# EAGLE board Demoboard_Reste (EAGLE 6.5.0)
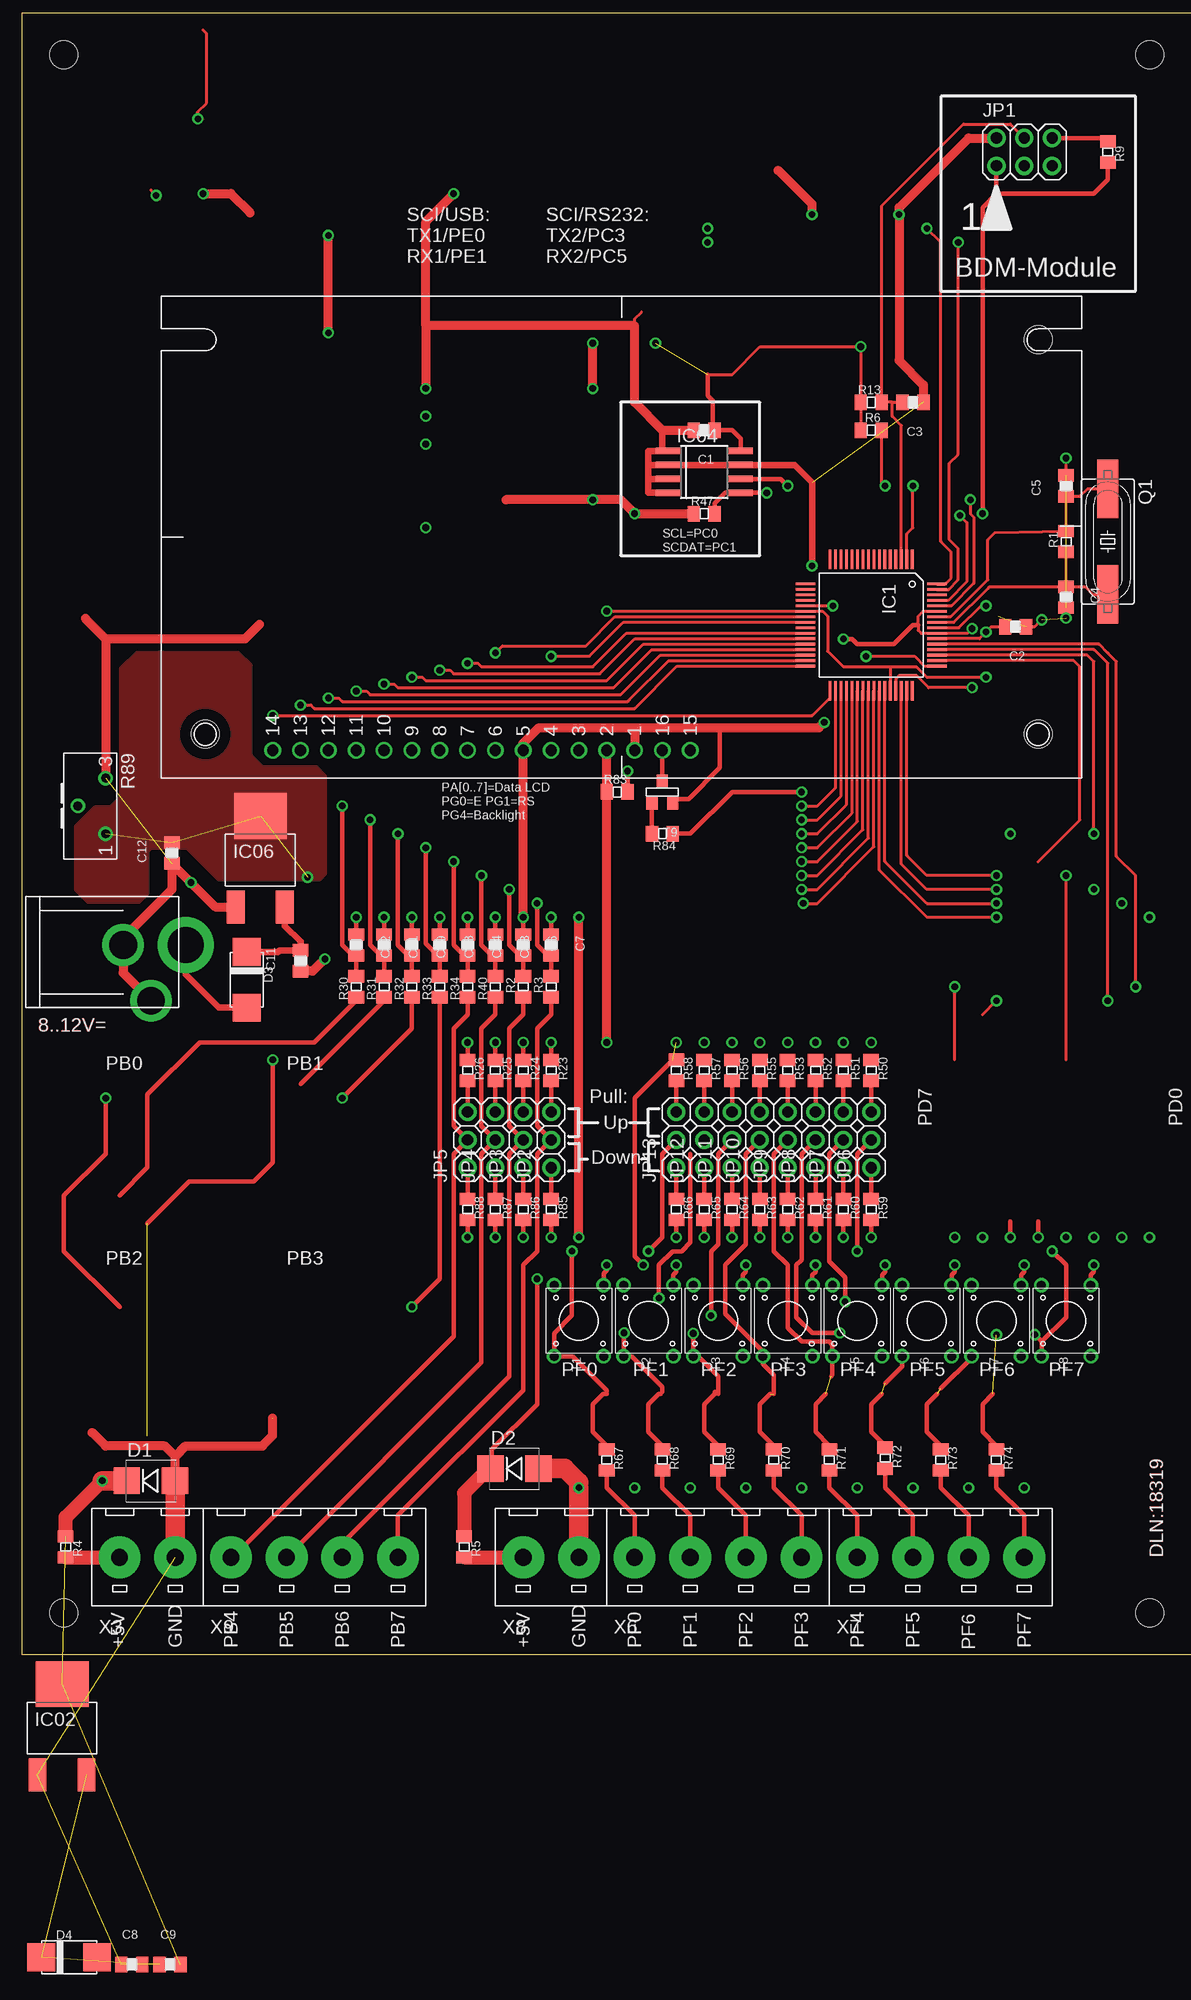
[diagram p0: board, top side]
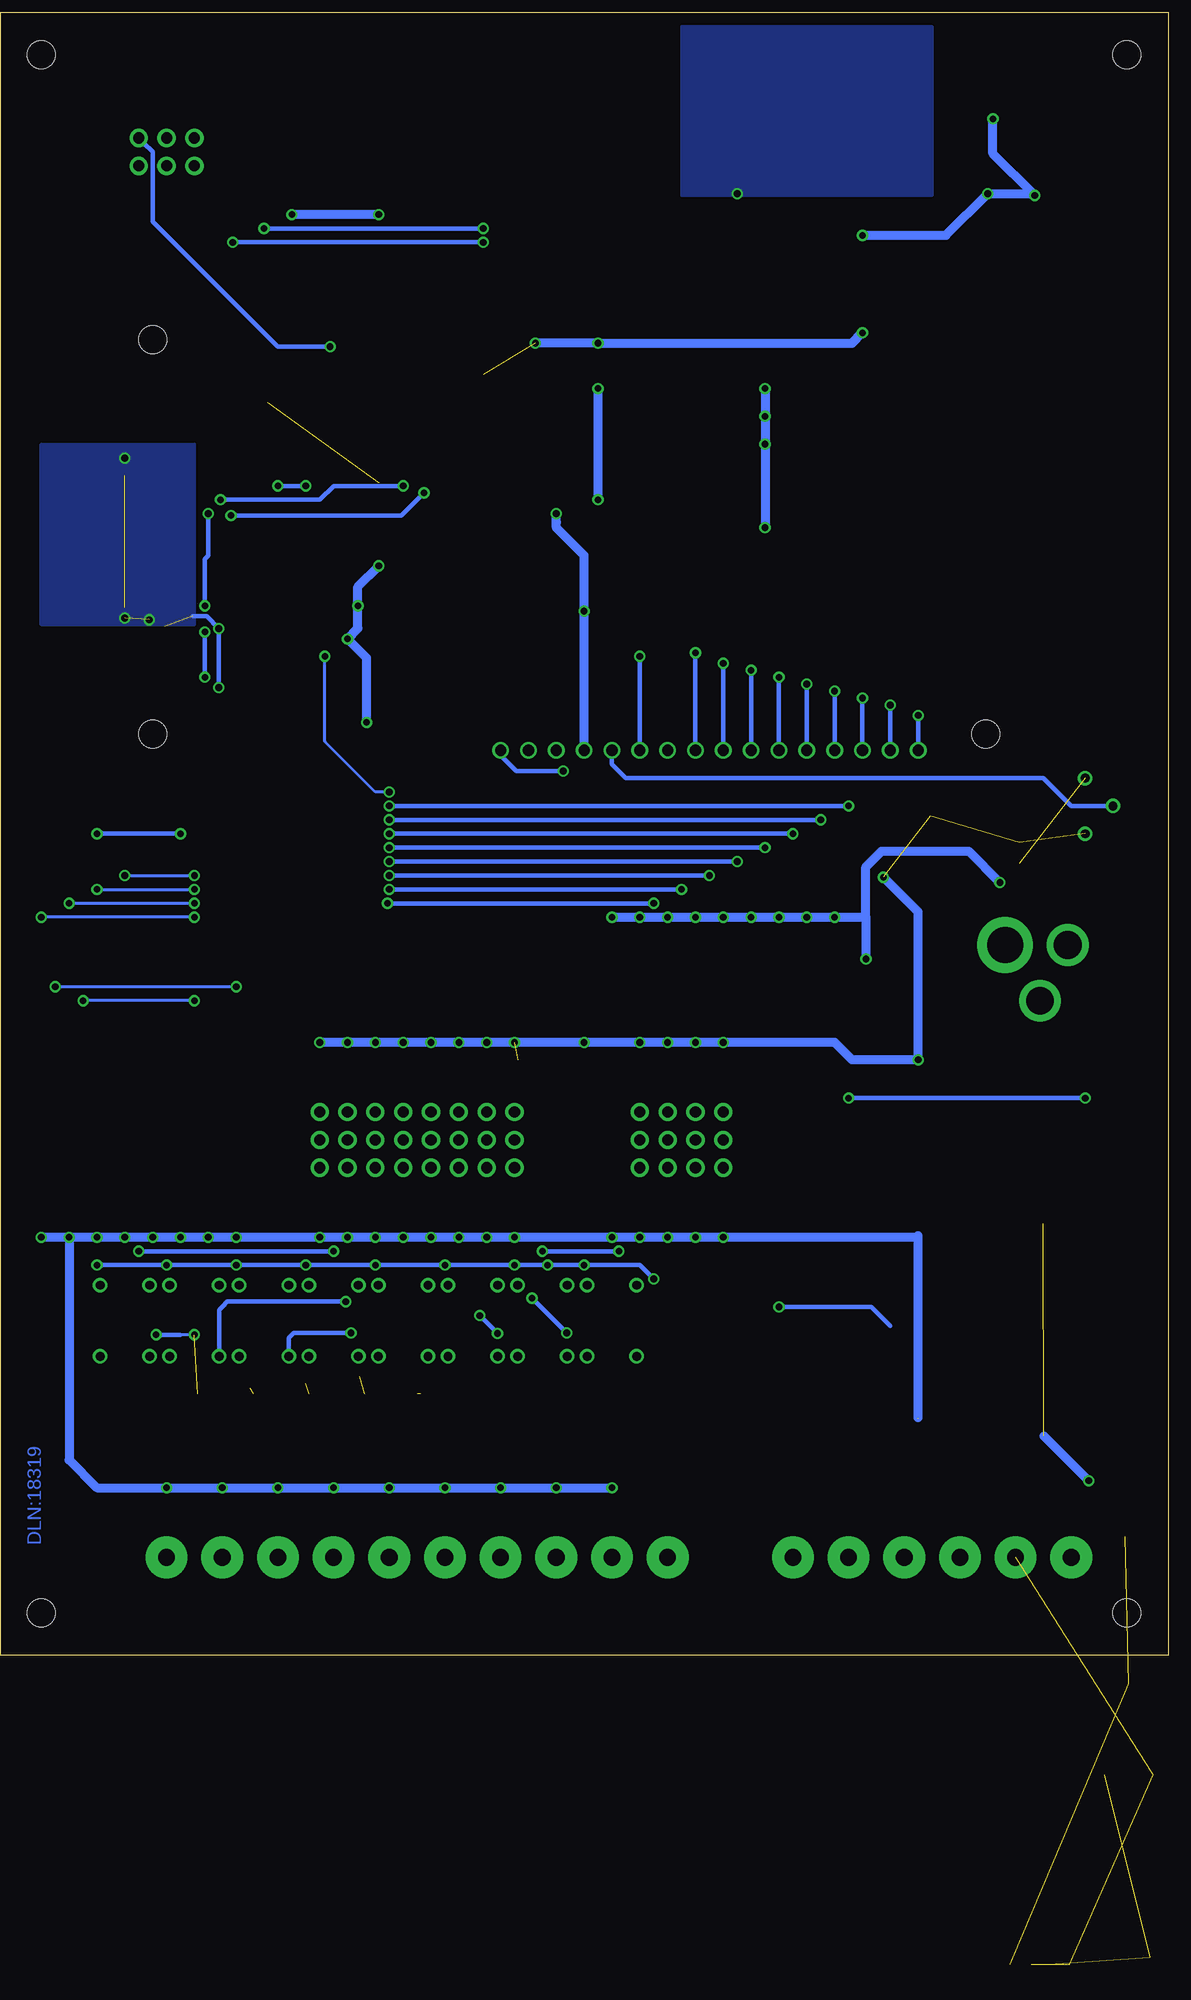
[diagram p1: board, bottom side, seen from below]

No outline drawn. Coordinates in mm, seen from the top.
Copper layers (1*16): Top 0.035mm / dielectric 1.5mm / Bottom 0.035mm
Design rules "default": minimum track width 10mil, minimum drill 24mil, track to track 8mil, track to pad 8mil, pad to pad 8mil, via to via 8mil, smd to smd 8mil, copper to edge 40mil, drill to drill 8mil, minimum pad ring 10mil, minimum via ring 8mil, stop-mask expansion 0mil, vias tented up to drill 0mil, thermal gap 10mil
Holes 2.54 mm at 4.92,146.05 103.98,146.05 103.98,3.81 4.92,3.81
Milling: 4 lines

## Footprints (pad centres in the part's own frame; a part is rotated, then mirrored left to right if it is on the bottom)
0805F = smd 1.118 x 1.422: 1 -0.953,0; 2 0.953,0
SMB = smd 2.4 x 2.4: A 2.2,0; C -2.2,0
MELF_B = smd 2.54 x 2.54: A 2.54,0; K -2.54,0
LQFP64 = smd 1.778 x 0.254: 1 -6,3.75; 2 -6,3.25; 3 -6,2.75; 4 -6,2.25; 5 -6,1.75; 6 -6,1.25; 7 -6,0.75; 8 -6,0.25; 9 -6,-0.25; 10 -6,-0.75; 11 -6,-1.25; 12 -6,-1.75; 13 -6,-2.25; 14 -6,-2.75; 15 -6,-3.25; 16 -6,-3.75; 33 6,-3.75; 34 6,-3.25; 35 6,-2.75; 36 6,-2.25; 37 6,-1.75; 38 6,-1.25; 39 6,-0.75; 40 6,-0.25; 41 6,0.25; 42 6,0.75; 43 6,1.25; 44 6,1.75; 45 6,2.25; 46 6,2.75; 47 6,3.25; 48 6,3.75 | smd 0.254 x 1.778: 17 -3.75,-6; 18 -3.25,-6; 19 -2.75,-6; 20 -2.25,-6; 21 -1.75,-6; 22 -1.25,-6; 23 -0.75,-6; 24 -0.25,-6; 25 0.25,-6; 26 0.75,-6; 27 1.25,-6; 28 1.75,-6; 29 2.25,-6; 30 2.75,-6; 31 3.25,-6; 32 3.75,-6; 49 3.75,6; 50 3.25,6; 51 2.75,6; 52 2.25,6; 53 1.75,6; 54 1.25,6; 55 0.75,6; 56 0.25,6; 57 -0.25,6; 58 -0.75,6; 59 -1.25,6; 60 -1.75,6; 61 -2.25,6; 62 -2.75,6; 63 -3.25,6; 64 -3.75,6
DPAK = smd 1.6 x 2.997: 1 -2.261,-3.658; 3 2.21,-3.658 | smd 4.826 x 4.191: 4 0,4.623
SO-08M = smd 0.6 x 2.2: 1 -1.905,-3.33; 2 -0.635,-3.33; 3 0.635,-3.33; 4 1.905,-3.33; 5 1.905,3.33; 6 0.635,3.33; 7 -0.635,3.33; 8 -1.905,3.33
2X03 = drill 1.016 pad 1.676: 1 -2.54,-1.27; 2 -2.54,1.27; 3 0,-1.27; 4 0,1.27; 5 2.54,-1.27; 6 2.54,1.27
1X03 = drill 1.016 pad 1.651: 1 -2.54,0; 2 0,0; 3 2.54,0
HC49UP = smd 5.334 x 1.93: 1 -4.826,0; 2 4.826,0
0805 = smd 1.118 x 1.422: 1 -0.953,0; 2 0.953,0
S63X = drill 0.813: 1 2.54,0; 2 0,-2.54; 3 -2.54,0
TASTE_THT = drill 0.813: A1 -3.251,2.261; A2 3.251,2.261; B1 -3.251,-2.261; B2 3.251,-2.261
SOT-23 = smd 1.016 x 1.27: 1 -0.953,0.953; 2 0.953,0.953; 3 0,-0.953
KLEMME2 = drill 1.524 pad 3.81: 1 0,-2.54; 2 0,2.54
SPP = drill 2.54 pad 3.81: 1 0,0; 3 -2.54,5.08 | drill 3.302 pad 5.08: 2 -5.715,0
KLEMME4 = drill 1.524 pad 3.81: 1 0,-7.62; 2 0,-2.54; 3 0,2.54; 4 0,7.62
FDCC1602E = drill 1.016: 1 43.18,2.54; 2 40.64,2.54; 3 38.1,2.54; 4 35.56,2.54; 5 33.02,2.54; 6 30.48,2.54; 7 27.94,2.54; 8 25.4,2.54; 9 22.86,2.54; 10 20.32,2.54; 11 17.78,2.54; 12 15.24,2.54; 13 12.7,2.54; 14 10.16,2.54; 15 48.26,2.54; 16 45.72,2.54 | hole 2.54: 4,4; 80,4; 80,40

## Placement (x,y rotation side)
C1  100nF  [0805F]  63.34,111.76 180 top
C2  100nF  [0805F]  91.76,93.82 180 top
C3  100nF  [0805F]  82.39,114.3 180 top
C4  10pF  [0805F]  96.36,96.52 270 top
C5  10pF  [0805F]  96.36,106.68 90 top
C6  10nF  [0805F]  46.83,64.77 270 top
C7  10nF  [0805F]  49.37,64.77 270 top
C8  1µF  [0805F]  11.11,-28.26 0 top
C9  1µF  [0805F]  14.61,-28.26 0 top
C11  1µF  [0805F]  26.51,63.34 90 top
C12  1µF  [0805F]  14.76,73.18 90 top
C13  10nF  [0805F]  44.29,64.77 270 top
C14  10nF  [0805F]  41.75,64.77 270 top
C18  10nF  [0805F]  39.21,64.77 270 top
C19  10nF  [0805F]  36.67,64.77 270 top
C21  10nF  [0805F]  34.13,64.77 270 top
C22  10nF  [0805F]  31.59,64.77 270 top
D1  SA5.0CA  [SMB]  12.86,15.88 0 top
D2  SA5.0CA  [SMB]  46.04,16.99 0 top
D3  1N4007  [MELF_B]  21.59,61.59 270 top
D4  1N4007  [MELF_B]  5.4,-27.62 0 top
IC1  MC9S08AW60  [LQFP64]  78.58,93.98 270 top
IC02  LM1117-5.0  [DPAK]  4.76,-7.3 0 top
IC04  24LC256  [SO-08M]  63.34,107.95 270 top
IC06  LM1117-5.0  [DPAK]  22.86,71.91 0 top
JP1  [2X03]  92.55,137.16 0 top
JP2  [1X03]  49.37,46.99 90 top
JP3  [1X03]  46.83,46.99 90 top
JP4  [1X03]  44.29,46.99 90 top
JP5  [1X03]  41.75,46.99 90 top
JP6  [1X03]  78.58,46.99 90 top
JP7  [1X03]  76.04,46.99 90 top
JP8  [1X03]  73.5,46.99 90 top
JP9  [1X03]  70.96,46.99 90 top
JP10  [1X03]  68.42,46.99 90 top
JP11  [1X03]  65.88,46.99 90 top
JP12  [1X03]  63.34,46.99 90 top
JP13  [1X03]  60.8,46.99 90 top
Q1  4M9152  [HC49UP]  100.17,101.6 270 top
R1  1M  [0805]  96.36,101.6 270 top
R2  10k  [0805]  46.83,60.96 270 top
R3  10k  [0805]  49.37,60.96 270 top
R4  27R  [0805]  5.08,9.84 90 top
R5  27R  [0805]  41.43,9.84 90 top
R6  10k  [0805]  78.58,111.76 180 top
R9  10k  [0805]  100.17,137.16 90 top
R13  10k  [0805]  78.58,114.3 180 top
R23  10k  [0805]  49.37,53.34 90 top
R24  10k  [0805]  46.83,53.34 90 top
R25  10k  [0805]  44.29,53.34 90 top
R26  10k  [0805]  41.75,53.34 90 top
R30  10k  [0805]  31.59,60.96 270 top
R31  10k  [0805]  34.13,60.96 270 top
R32  10k  [0805]  36.67,60.96 270 top
R33  10k  [0805]  39.21,60.96 270 top
R34  10k  [0805]  41.75,60.96 270 top
R40  10k  [0805]  44.29,60.96 270 top
R47  680R  [0805]  63.34,104.14 180 top
R50  10k  [0805]  78.58,53.34 90 top
R51  10k  [0805]  76.04,53.34 90 top
R52  10k  [0805]  73.5,53.34 90 top
R53  10k  [0805]  70.96,53.34 90 top
R55  10k  [0805]  68.42,53.34 90 top
R56  10k  [0805]  65.88,53.34 90 top
R57  10k  [0805]  63.34,53.34 90 top
R58  10k  [0805]  60.8,53.34 90 top
R59  10k  [0805]  78.58,40.64 90 top
R60  10k  [0805]  76.04,40.64 90 top
R61  10k  [0805]  73.5,40.64 90 top
R62  10k  [0805]  70.96,40.64 90 top
R63  10k  [0805]  68.42,40.64 90 top
R64  10k  [0805]  65.88,40.64 90 top
R65  10k  [0805]  63.34,40.64 90 top
R66  10k  [0805]  60.8,40.64 90 top
R67  100R  [0805]  54.45,17.78 90 top
R68  100R  [0805]  59.53,17.78 90 top
R69  100R  [0805]  64.61,17.78 90 top
R70  100R  [0805]  69.69,17.78 90 top
R71  100R  [0805]  74.77,17.78 90 top
R72  100R  [0805]  79.85,17.94 90 top
R73  100R  [0805]  84.93,17.78 90 top
R74  100R  [0805]  90.01,17.78 90 top
R83  100R  [0805]  55.4,78.74 180 top
R84  1k  [0805]  59.53,74.93 0 top
R85  10k  [0805]  49.37,40.64 90 top
R86  10k  [0805]  46.83,40.64 90 top
R87  10k  [0805]  44.29,40.64 90 top
R88  10k  [0805]  41.75,40.64 90 top
R89  10k  [S63X]  8.73,77.47 270 top
T1  [TASTE_THT]  51.91,30.48 270 top
T2  [TASTE_THT]  58.26,30.48 270 top
T3  [TASTE_THT]  64.61,30.48 270 top
T4  [TASTE_THT]  70.96,30.48 270 top
T5  [TASTE_THT]  77.31,30.48 270 top
T6  [TASTE_THT]  83.66,30.48 270 top
T7  [TASTE_THT]  90.01,30.48 270 top
T8  [TASTE_THT]  96.36,30.48 270 top
T9  [SOT-23]  59.53,78.74 180 top
X3  [KLEMME2]  12.54,8.89 270 top
X4  SPP  [SPP]  10.32,64.77 180 top
X6  [KLEMME4]  64.61,8.89 270 top
X7  [KLEMME4]  84.93,8.89 270 top
X8  [KLEMME2]  49.37,8.89 270 top
X9  [KLEMME4]  27.78,8.89 270 top
X10  [FDCC1602E]  13.81,80.01 0 top

## Library data of the parts
C1-C9 C11-C14 C18 C19 C21 C22 D3 D4 IC02 IC06 R1-R6 R9 R13 R23-R26 R30-R34 R40 R47 R50-R53 R55-R74 R83-R88 T1-T9 = deto
D1 D2 = diode
IC1 = MOTOROLA
IC04 = microchip
JP1-JP13 = pinhead
Q1 = crystal
R89 = pot
X3 X4 X6-X9 = CONNECT
X10 = DISP-LCD

## Nets
+5V: C1.1 C2.2 C9.2 C12.2 D1.C D2.C IC1.22 IC1.44 IC1.54 IC02.4 IC04.8 IC06.4 JP1.6 R4.2 R5.2 R6.2 R9.2 R13.2 R23.2 R24.2 R25.2 R26.2 R47.2 R83.2 R89.1 T1.A1 T2.A1 T3.A1 T4.A1 T5.A1 T6.A1 T7.A1 T8.A1 X10.2
ADCPB0: C22.2 IC1.34 R30.1
ADCPB1: C21.2 IC1.35 R31.1
ADCPB2: C19.2 IC1.36 R32.1
ADCPB3: C18.2 IC1.37 R33.1
ADCPB4: C14.2 IC1.38 R34.1
ADCPB5: C13.2 IC1.39 R40.1
ADCPB6: C6.2 IC1.40 R2.1
ADCPB7: C7.2 IC1.41 R3.1
ANA0: R30.2
ANA1: R31.2
ANA2: R32.2
ANA3: R33.2
ANA4: JP5.2 R34.2 X9.1
ANA5: JP4.2 R40.2 X9.2
ANA6: JP3.2 R2.2 X9.3
ANA7: JP2.2 R3.2 X9.4
BKGD: IC1.56 JP1.1 R9.1
D0: IC1.26 X10.7
D1: IC1.27 X10.8
D2: IC1.28 X10.9
D3: IC1.29 X10.10
GND: C1.2 C2.1 C3.1 C4.2 C5.2 C6.1 C7.1 C8.1 C9.1 C11.1 C12.1 C13.1 C14.1 C18.1 C19.1 C21.1 C22.1 D1.A D2.A IC1.21 IC1.45 IC1.55 IC1.59 IC02.1 IC04.1 IC04.2 IC04.3 IC04.4 IC04.7 IC06.1 JP1.2 R59.1 R60.1 R61.1 R62.1 R63.1 R64.1 R65.1 R66.1 R85.1 R86.1 R87.1 R88.1 R89.3 T9.1 X3.2 X4.1 X4.3 X8.2 X10.1 X10.5
IRQ: IC1.2 R6.1
LCD_LED: IC1.49 R84.2
N$1: C8.2 D4.K IC02.3
N$4: IC1.42
N$8: IC1.43
N$9: IC1.46
N$10: IC1.47
N$11: JP13.3 R58.1
N$12: JP12.3 R57.1
N$13: R69.2 T3.B2
N$15: JP13.2
N$16: C4.1 IC1.57 Q1.2 R1.2
N$17: IC1.50
N$18: IC1.51
N$19: IC1.52
N$20: IC1.53
N$22: C5.1 IC1.58 Q1.1 R1.1
N$34: JP11.3 R56.1
N$35: R71.2 T5.B2
N$36: R72.2 T6.B2
N$37: R73.2 T7.B2
N$38: JP10.3 R55.1
N$39: JP9.3 R53.1
N$40: JP8.3 R52.1
N$41: JP7.3 R51.1
N$43: R5.1 X8.1
N$49: IC1.30 X10.11
N$50: IC1.31 X10.12
N$51: IC1.32 X10.13
N$52: IC1.33 X10.14
N$53: R4.1 X3.1
N$54: R67.2 T1.B2
N$55: IC1.23 X10.6
N$56: R68.2 T2.B2
N$57: JP6.3 R50.1
N$58: IC1.24 X10.4
N$59: R70.2 T4.B2
N$60: R89.2 X10.3
N$61: JP6.1 R59.2
N$62: JP7.1 R60.2
N$63: JP8.1 R61.2
N$64: JP9.1 R62.2
N$65: R74.2 T8.B2
N$66: JP10.1 R63.2
N$67: JP11.1 R64.2
N$68: JP12.1 R65.2
N$69: JP13.1 R66.2
N$70: C11.2 D3.K IC06.3
N$71: D3.A X4.2
N$72: JP12.2
N$73: JP10.2
N$74: JP6.2
N$75: JP11.2
N$76: JP9.2
N$77: JP8.2
N$78: JP7.2
N$86: R83.1 X10.15
N$87: T9.3 X10.16
N$88: R84.1 T9.2
N$89: JP5.3 R26.1
N$96: JP4.3 R25.1
N$97: JP3.3 R24.1
N$98: JP2.3 R23.1
N$99: JP2.1 R85.2
N$100: JP3.1 R86.2
N$101: JP4.1 R87.2
N$102: JP5.1 R88.2
PF0: R67.1 X6.1
PF1: R68.1 X6.2
PF2: R69.1 X6.3
PF3: R70.1 X6.4
PF4: R71.1 X7.1
PF5: R72.1 X7.2
PF6: R73.1 X7.3
PF7: R74.1 X7.4
RESET: C3.2 IC1.3 JP1.4 R13.1
RX2: IC1.64
SCL: IC1.60 IC04.6
SDA: IC1.61 IC04.5 R47.1
TX2: IC1.63

## Tracks (layer width: path | path; a pad name or v marks a point on that pad's centre or on a via)
+5V  (via drill 0.61)  (8 unrouted)
  Top 0.254: IC1.54 88.44,92.73 v89.06,93.34 89.53,93.82 C2.2 | 17.62,148.27 17.94,147.96 17.94,141.6 17.14,140.81 v17.14,140.18 | v17.14,140.18 16.91,140.18 | v17.14,140.18 17.56,140.18 | v13.34,133.19 13.66,132.87 | v13.34,133.19 | v13.34,133.19 12.86,133.67 | v13.34,133.19 | 64.14,111.76 C1.1 | IC1.44 80.33,89.7 80.33,90.17 | 80.33,90.17 82.71,90.17 83.66,89.22 v89.06,89.22 | R6.2 | R6.2 R13.2 v77.63,119.38 68.42,119.38 65.88,116.84 63.66,116.84 | v54.45,95.25 54.47,95.23 IC1.22 74.16,95.23 74.61,94.77 74.61,91.6 76.04,90.17 80.17,90.17 80.33,90.17
  Top 0.406: v41.75,55.88 R26.2 | v44.29,55.88 R25.2 | v46.83,55.88 R24.2 | v49.37,55.88 R23.2 | v63.34,55.88 63.34,55.72 | R83.2 | R83.2 | R83.2 | T1.A1 54.17,34.8 54.45,35.08 v54.45,35.56 | v60.8,35.56 60.8,34.92 60.52,34.65 T2.A1 | T3.A1 66.87,34.65 67.15,34.92 v67.15,35.56 | T4.A1 73.22,34.65 73.5,34.92 v73.5,35.56 | T5.A1 79.57,34.65 79.85,34.92 v79.85,35.56 | T6.A1 85.92,34.65 86.2,34.92 v86.2,35.56 | T7.A1 92.27,34.65 92.55,34.92 v92.55,35.56 | T8.A1 98.62,34.65 98.9,34.92 v98.9,35.56 | v48.1,34.29 48.1,22.86 43.97,18.73 43.97,17.3 43.84,17.12 | IC04.8 66.67,110.97 65.88,111.76 64.14,111.76 | v57.78,35.56 56.99,36.35 56.99,50.8 60.48,54.29 | R9.2 | JP1.6 99.85,138.43 R9.2 | 64.14,111.76 | 64.14,111.76 64.14,114.46 63.66,114.94 63.66,116.84 | 63.66,116.84 | 63.66,116.84 | 43.84,17.12 43.81,17.14 | 43.84,17.12 D2.C | v23.97,54.29 23.97,44.93 22.23,43.18 16.35,43.18 12.54,39.37 | 12.54,39.37 | v54.45,55.88 | v29.05,129.54 | v53.18,105.41
  Top 0.813: X10.2 R83.2 v54.45,55.88 | 21.91,131.6 20.16,133.35 v17.62,133.35 | v29.05,120.65 v29.05,129.54 | R47.2 v56.99,104.14 55.72,105.41 v53.18,105.41 45.24,105.41 | v53.18,115.57 v53.18,119.7
  Top 1.27: R5.2 41.43,14.76 43.81,17.14 | R4.2 5.08,12.54 v8.41,15.88
  Top 1.778: v8.41,15.88 D1.C
  Bottom 0.254: 13.49,133.35 v13.34,133.19
  Bottom 0.406: v98.9,35.56 v92.55,35.56 v86.2,35.56 v79.85,35.56 v73.5,35.56 v67.15,35.56 v60.8,35.56 v57.78,35.56 v54.45,35.56 49.37,35.56 v48.1,34.29 | v89.06,89.22 v89.06,93.34 | v77.63,119.38 82.39,119.38 93.82,130.81 93.82,137.16 94.61,137.95 | v54.45,95.25 | v54.45,95.25 | 94.61,137.95 | JP1.6 | 94.61,137.95 JP1.6
  Bottom 0.813: v78.58,55.88 v76.04,55.88 v73.5,55.88 v70.96,55.88 v68.42,55.88 v65.88,55.88 v63.34,55.88 v60.8,55.88 v54.45,55.88 v49.37,55.88 v46.83,55.88 v44.29,55.88 v41.75,55.88 31.59,55.88 30,54.29 v23.97,54.29 23.97,67.79 v27.15,70.96 | v13.34,133.19 17.14,137 v17.14,140.18 | 13.49,133.35 v17.62,133.35 21.43,129.54 v29.05,129.54 | v58.9,119.7 v53.18,119.7 30,119.7 v29.05,120.65 | v56.99,104.14 56.99,103.35 56.99,102.87 54.45,100.33 v54.45,95.25 X10.2 | v53.18,105.41 v53.18,115.57 | v8.41,15.88 12.5,19.96
  pour Top (no thermals): 10.16,90.01 10.16,78.26 9.21,77.31 7.78,77.31 6.03,75.56 6.03,69.85 7.14,68.74 11.75,68.74 12.54,69.53 12.54,73.34 12.86,73.66 16.19,73.66 19.05,70.8 28.26,70.8 28.73,71.28 28.73,80.17 27.94,80.96 23.02,80.96 21.91,82.07 21.91,90.33 20.8,91.44 11.59,91.44
ADCPB0  (via drill 0.61)
  Top 0.254: IC1.34 75.33,79.14 73.66,77.47 v72.23,77.47
  Top 0.406: R30.1 | R30.1 C22.2 31.27,63.82 30.32,64.77 v30.32,77.47 | R30.1
  Bottom 0.406: v30.32,77.47 v72.23,77.47
ADCPB1  (via drill 0.61)
  Top 0.254: IC1.35 75.83,78.37 73.66,76.2 v72.23,76.2
  Top 0.406: 34.13,63.98 | 34.13,63.98 C21.2 | R31.1 34.13,63.98 | 34.13,63.98 | 34.13,63.98 33.66,63.98 32.86,64.77 v32.86,76.2
  Bottom 0.406: v32.86,76.2 v72.23,76.2
ADCPB2  (via drill 0.61)
  Top 0.254: IC1.36 76.33,77.6 73.66,74.93 v72.23,74.93
  Top 0.406: C19.2 36.35,63.82 35.4,64.77 v35.4,74.93 | v35.4,74.93 | C19.2 | R32.1 C19.2
  Bottom 0.406: v35.4,74.93 v72.23,74.93
ADCPB3  (via drill 0.61)
  Top 0.254: IC1.37 76.83,76.83 73.66,73.66 v72.23,73.66
  Top 0.406: C18.2 | R33.1 C18.2 | C18.2 39.05,63.82 37.94,64.93 v37.94,73.66
  Bottom 0.406: v37.94,73.66 v72.23,73.66
ADCPB4  (via drill 0.61)
  Top 0.254: IC1.38 77.33,76.06 73.66,72.39 v72.23,72.39
  Top 0.406: R34.1 C14.2 41.43,63.82 40.48,64.77 v40.48,72.39
  Bottom 0.406: v40.48,72.39 v72.23,72.39
ADCPB5  (via drill 0.61)
  Top 0.254: IC1.39 77.83,75.29 73.66,71.12 v72.23,71.12
  Top 0.406: R40.1 C13.2 43.97,63.82 43.02,64.77 v43.02,71.12
  Bottom 0.406: v43.02,71.12 v72.23,71.12
ADCPB6  (via drill 0.61)
  Top 0.254: IC1.40 78.33,74.52 73.66,69.85 v72.23,69.85
  Top 0.406: 46.83,63.66 C6.2 46.51,63.82 45.56,64.77 v45.56,69.85 | R2.1 46.83,63.66 | 46.83,63.66
  Bottom 0.406: v45.56,69.85 v72.23,69.85
ADCPB7  (via drill 0.61)
  Top 0.254: IC1.41 78.83,73.75 73.66,68.58 v72.39,68.58
  Top 0.406: 49.37,63.66 | 49.37,63.66 C7.2 49.05,63.82 48.1,64.77 v48.1,68.58 | R3.1 49.37,63.66 | 49.37,63.66
  Bottom 0.406: v48.1,68.58 v72.39,68.58
ANA0
  Top 0.406: R30.2 31.59,59.69 27.78,55.88 17.3,55.88 12.54,51.12 12.54,44.45 10,41.91
ANA1
  Top 0.406: R31.2 34.13,59.69 26.51,52.07
ANA2  (via drill 0.61)
  Top 0.406: R32.2 36.67,57.15 v30.32,50.8 | v30.32,50.8 | v8.73,50.8 8.73,45.72 4.92,41.91 4.92,36.83 10,31.75
  Bottom 0.406: v8.73,50.8 v30.32,50.8
ANA3  (via drill 0.61)
  Top 0.406: R33.2 39.21,34.29 v36.67,31.75
  Bottom 0.406: 32.86,31.75 | 32.86,31.75 v36.67,31.75 | 26.51,30 28.26,31.75 32.86,31.75
ANA4
  Top 0.406: JP5.2 | JP5.2 40.48,45.72 40.48,29.05 20.32,8.89 X9.1 | JP5.2 | JP5.2 40.48,48.26 40.48,57.15 41.75,58.42 41.75,59.69 41.91,59.85 R34.2 | R34.2
ANA5
  Top 0.406: X9.2 | X9.2 43.02,26.67 43.02,45.72 JP4.2 | JP4.2 | JP4.2 | JP4.2 43.02,48.26 43.02,57.15 44.29,58.42 R40.2
ANA6
  Top 0.406: X9.3 30.32,10.16 45.56,25.4 45.56,45.72 JP3.2 | JP3.2 | JP3.2 | JP3.2 45.56,48.26 45.56,57.15 46.83,58.42 46.83,59.85 | 46.83,59.85 | 46.83,59.85 R2.2
ANA7
  Top 0.406: X9.4 35.4,12.7 46.83,24.13 46.83,35.56 48.1,36.83 48.1,45.72 JP2.2 | JP2.2 | JP2.2 | JP2.2 48.1,48.26 48.1,57.15 49.37,58.42 49.37,59.85 49.53,60.01 | 49.53,60.01 | 49.53,60.01 R3.2
BKGD  (via drill 0.61)
  Top 0.254: IC1.56 86.59,93.73 88.58,95.73 v89.06,95.73
  Top 0.406: R9.1 100.17,134.62 98.9,133.35 90.01,133.35 | 90.01,133.35 JP1.1 | v88.74,104.14 88.74,132.08 90.01,133.35
  Bottom 0.406: v89.06,95.73 89.06,100.01 88.74,100.33 v88.74,104.14
D0  (via drill 0.61)
  Top 0.254: v41.75,90.49 42.7,90.49 43.02,90.17 53.18,90.17 56.24,93.23 IC1.26
  Bottom 0.406: X10.7 41.75,90.17 v41.75,90.49
D1  (via drill 0.61)
  Top 0.254: v39.21,89.85 40.16,89.85 40.48,89.53 53.82,89.53 57.01,92.73 IC1.27
  Bottom 0.406: X10.8 39.21,89.53 v39.21,89.85
D2  (via drill 0.61)
  Top 0.254: v36.67,89.22 37.62,89.22 37.94,88.9 54.45,88.9 57.78,92.23 IC1.28
  Bottom 0.406: X10.9 36.67,88.9 v36.67,89.22
D3  (via drill 0.61)
  Top 0.254: v34.13,88.58 35.08,88.58 35.4,88.27 55.09,88.27 58.55,91.73 IC1.29
  Bottom 0.406: 34.13,88.27 v34.13,88.58 | X10.10 34.13,88.27 | 34.13,88.27
GND  (via drill 0.61)  (9 unrouted)
  Top 0.254: v37.94,110.49 | v37.94,110.49 37.73,110.28 | v37.94,102.87 37.85,102.78 | C5.2 v96.36,109.22 | C4.2 v96.36,94.61 | 57.63,122.56 56.99,121.92 56.99,121.28 | IC04.2 | IC1.21 72.55,95.73 v75.09,95.73 | IC1.59 83.32,95.23 82.87,94.77 82.87,93.98 82.87,93.5 83.14,93.23 IC1.55 87.36,93.23 v87.79,93.66 | v94.14,94.46 | v94.14,94.46 93.5,93.82 C2.1 | IC1.45 80.83,89.09 81.12,89.38 82.71,89.38 82.87,89.22 83.82,88.27 v87.79,88.27 | 77.15,92.39
  Top 0.406: 51.91,9.05 | 51.91,9.05 X8.2 | v31.59,67.31 C22.1 | v31.59,67.31 | v34.13,67.31 C21.1 | v34.13,67.31 | v39.21,67.31 39.21,67.15 | 39.21,67.15 C18.1 | 39.21,67.15 | v41.75,67.31 C14.1 | v44.29,67.31 C13.1 | v46.83,67.31 C6.1 | v49.37,67.31 49.37,67.15 | 49.37,67.15 C7.1 | 49.37,67.15 | v41.75,38.1 R88.1 | v44.29,38.1 R87.1 | v44.29,38.1 | v46.83,38.1 R86.1 | v49.37,38.1 R85.1 | v49.37,38.1 | v60.8,38.1 R66.1 | v63.34,38.1 R65.1 | v63.34,38.1 | v65.88,38.1 R64.1 | v68.42,38.1 R63.1 | v70.96,38.1 R62.1 | v73.5,38.1 R61.1 | v36.67,67.31 C19.1 | v36.67,67.31 | 64.77,84.61 64.77,84.14 64.77,80.96 61.91,78.11 60.8,78.11 T9.1 | T9.1 | 56.99,84.61 | 56.99,84.61 | v78.58,38.1 R59.1 | v76.04,38.1 R60.1 | 59.53,111.76 | v76.04,92.71 76.83,92.71 77.15,92.39 | 77.15,92.39 77.31,92.23 80.64,92.23 82.39,93.98 82.87,93.98 | 59.53,111.76 | 59.53,111.76 | IC04.1 59.53,109.86 | 91.28,39.53 | v91.28,38.1 91.28,39.53 | 93.82,39.53 v93.82,38.1 | v51.91,15.24 51.91,15.72 | X3.2 | X3.2 15.06,8.91 | D1.A 15.06,18.12 | C12.1 | 10.32,65.41 X4.1 | 14.76,72.07 | C12.1 14.76,72.07 | v92.55,15.24 | X10.5 | v86.2,38.1 | v88.74,38.1 | 8.73,92.71 | v37.94,115.57 | 37.94,121.28
  Top 0.61: 58.26,108.58 IC04.2 IC04.7 71.6,108.58 73.18,107 v73.18,99.38 | 58.26,108.58 58.26,109.86 IC04.1 | 58.26,107.31 IC04.3 | 58.26,108.58 58.26,107.31 | IC04.4 58.26,106.05 58.26,107.31 | 59.53,109.86 59.53,111.76
  Top 0.813: 56.99,84.61 56.04,84.61 48.26,84.61 46.83,83.19 X10.5 v46.83,67.31 | 56.99,84.61 64.77,84.61 73.82,84.61 v74.3,85.09 | 56.99,84.61 X10.1 | v51.91,38.1 v51.91,67.31 | JP1.2 87.47,138.43 81.12,132.08 v81.12,131.44 81.12,118.11 83.34,115.89 C3.1 | 22.77,94.05 21.43,92.71 8.73,92.71 | 8.73,92.71 6.87,94.57 | 8.73,92.71 R89.3 | C1.2 59.53,111.76 56.99,114.3 56.99,121.28 37.94,121.28 | v73.18,131.44 73.18,132.4 70.1,135.48 | v40.48,133.35 37.94,130.81 37.94,121.28 | 37.94,121.28 v37.94,115.57 | 15.06,18.12 14.13,19.05 8.73,19.05 7.5,20.28 | D1.A 15.06,18.07 16.03,19.05 23.02,19.05 23.97,20 23.97,21.59 | IC06.1 18.74,68.26 v16.51,70.48 C12.1 | 10.32,65.41 14.76,69.85 14.76,72.07 | X4.1 10.32,62.23 X4.3 | C11.1 27.62,62.39 v28.73,63.5
  Top 1.778: v51.91,15.24 51.91,9.05 | 51.91,15.72 50.64,16.99 D2.A | 15.06,8.91 D1.A
  Bottom 0.406: v101.44,38.1 101.6,38.1 101.44,37.94 | 90.17,94.77 88.9,94.77 v87.79,93.66 87.79,92.08 v87.79,88.27 | 24.01,38.3 23.97,38.26 24.13,38.1 | v86.2,38.1 | v51.91,67.31
  Bottom 0.813: v51.91,15.24 v56.99,15.24 v62.07,15.24 v67.15,15.24 v72.23,15.24 v77.31,15.24 v82.39,15.24 v87.47,15.24 v92.55,15.24 98.9,15.24 101.44,17.78 101.44,37.94 | v37.94,115.57 v37.94,113.03 v37.94,110.49 v37.94,102.87 | v101.44,38.1 v98.9,38.1 v96.36,38.1 v93.82,38.1 v91.28,38.1 v88.74,38.1 v86.2,38.1 v78.58,38.1 v76.04,38.1 v73.5,38.1 v70.96,38.1 v68.42,38.1 v65.88,38.1 v63.34,38.1 v60.8,38.1 v51.91,38.1 v49.37,38.1 v46.83,38.1 v44.29,38.1 v41.75,38.1 24.13,38.1 | 101.6,38.1 v103.98,38.1 | v73.18,99.38 75.09,97.47 v75.09,95.73 75.09,93.66 v76.04,92.71 74.3,90.96 v74.3,85.09 | v73.18,131.44 v81.12,131.44 | v51.91,67.31 v49.37,67.31 v46.83,67.31 v44.29,67.31 v41.75,67.31 v39.21,67.31 v36.67,67.31 v34.13,67.31 v31.59,67.31 28.73,67.31 | 23.97,21.63 23.97,38.26 | 28.73,67.31 v28.73,63.5 | 28.73,67.31 28.73,71.91 27.3,73.34 19.37,73.34 v16.51,70.48
  pour Bottom: 90.01,110.49 90.01,93.98 103.98,93.98 103.98,110.49
  pour Bottom: 22.7,148.59 45.56,148.59 45.56,133.19 22.7,133.19
IRQ  (via drill 0.61)
  Top 0.254: R6.1 79.53,107 v79.85,106.68 | IC1.2 81.83,102.31 82.39,102.87 v82.39,106.68
  Bottom 0.406: v82.39,106.68 v79.85,106.68
LCD_LED  (via drill 0.61)
  Top 0.254: IC1.49 83.44,90.23 82.55,91.12 v78.11,91.12 | v78.11,91.12
  Top 0.406: v72.23,78.74 65.88,78.74 62.07,74.93 R84.2 | R84.2
  Bottom 0.254: v78.11,91.12 78.11,83.34 73.5,78.74 v72.23,78.74
N$1  (2 unrouted)
N$4  (via drill 0.61)
  Top 0.254: IC1.42 79.33,71.64 83.66,67.31 v90.01,67.31 | v103.98,67.31
  Bottom 0.254: v90.01,67.31 v103.98,67.31
N$8  (via drill 0.61)
  Top 0.254: IC1.43 79.83,72.41 83.66,68.58 v90.01,68.58
  Bottom 0.254: v90.01,68.58 v101.44,68.58
N$9  (via drill 0.61)
  Top 0.254: IC1.46 81.33,72.18 83.66,69.85 v90.01,69.85
  Bottom 0.254: v98.9,69.85 v90.01,69.85
N$10  (via drill 0.61)
  Top 0.254: IC1.47 81.83,72.95 83.66,71.12 v90.01,71.12 | 96.36,54.29 v96.36,71.12
  Bottom 0.254: v96.36,71.12 v90.01,71.12
N$11
  Top 0.406: JP13.3 R58.1
N$12
  Top 0.406: JP12.3 | JP12.3 | R57.1 | JP12.3 R57.1
N$13  (via drill 0.61)
  Top 0.406: R69.2 64.61,19.05 63.34,20.32 63.34,22.86 64.29,23.81 64.29,23.97 | 64.29,23.97 | 64.29,23.97 64.45,23.97 64.61,23.81 64.61,25.4 62.78,27.23 T3.B2 v62.35,29.33 | 65.88,46.99 64.61,45.72 64.61,37.47 63.98,36.83 v63.98,30.96
  Bottom 0.406: v62.35,29.33 v63.98,30.96
N$16
  Top 0.254: C4.1 | C4.1 R1.2 | Q1.2 98.81,96.77 98.11,97.47 96.2,97.47 | 96.2,97.47 C4.1 | 89.22,97.31 | 89.22,97.31 89.38,97.47 96.2,97.47 | IC1.57 86.13,94.23 89.22,97.31
N$17
  Top 0.254: IC1.50 97.07,90.73 97.63,90.17 | 97.63,90.17 | 97.63,90.17 97.63,76.2 93.82,72.39
N$18  (via drill 0.61)
  Top 0.254: v98.9,74.93 98.9,90.65 98.32,91.23 IC1.51
  Bottom 0.406: v91.28,74.93 v98.9,74.93
N$19  (via drill 0.61)
  Top 0.254: IC1.52 98.93,91.73 100.17,90.49 v100.17,59.69 | 88.74,58.42 v90.01,59.69
  Bottom 0.254: v90.01,59.69 v100.17,59.69
N$20  (via drill 0.61)
  Top 0.254: IC1.53 99.38,92.23 100.17,91.44 | 100.17,91.44 | 100.17,91.44 100.97,90.65 100.97,72.87 102.71,71.12 v102.71,60.96 | 86.2,54.29 v86.2,60.96
  Bottom 0.254: v86.2,60.96 v102.71,60.96
N$22
  Top 0.254: IC1.58 85.84,94.73 89.22,98.11 89.22,101.76 89.85,102.39 R1.1 C5.1 | Q1.1 98.33,106.43 97.63,105.73 C5.1 | C5.1
N$34
  Top 0.406: JP11.3 R56.1
N$35  (1 unrouted)
  Top 0.406: R71.2 74.77,19.05 73.5,20.32 73.5,22.86 74.45,23.81 | 74.45,23.81 | 74.93,25.4 75.05,25.52 T5.B2 75.05,28.3 74.77,28.57 72.23,28.57 70.96,29.84 70.96,35.56 69.69,36.83 69.69,45.72 70.96,46.99
N$36  (via drill 0.61)  (1 unrouted)
  Top 0.406: R72.2 79.85,19.05 78.58,20.32 78.58,22.86 79.53,23.81 | T6.B2 81.4,26.31 79.85,24.77 | 73.5,46.99 72.23,45.72 72.23,36.04 71.75,35.56 71.75,30.8 73.18,29.37 v75.72,29.37
  Bottom 0.406: v75.72,29.37 80.96,29.37 81.4,28.93 T6.B2
N$37  (via drill 0.61)  (1 unrouted)
  Top 0.406: R73.2 84.93,19.05 83.66,20.32 83.66,22.86 84.61,23.81 | T7.B2 87.75,27.11 84.93,24.29 | 76.04,46.99 74.77,45.72 74.77,35.88 76.2,34.45 v76.2,32.23
  Bottom 0.406: v76.2,32.23 87,32.23 87.47,31.75 87.75,31.47 T7.B2
N$38
  Top 0.406: JP10.3 | JP10.3 R55.1
N$39
  Top 0.406: JP9.3 | JP9.3 R53.1
N$40
  Top 0.406: JP8.3 | JP8.3 R52.1
N$41
  Top 0.406: JP7.3 | JP7.3 R51.1
N$43
  Top 0.406: X8.1 46.99,8.89
  Top 1.27: R5.1 X8.1
N$49  (via drill 0.61)
  Top 0.254: v31.59,87.95 32.54,87.95 32.86,87.63 55.72,87.63 59.32,91.23 IC1.30
  Bottom 0.406: X10.11 31.59,87.63 v31.59,87.95
N$50  (via drill 0.61)
  Top 0.254: v29.05,87.31 30,87.31 30.32,87 56.36,87 56.52,87.15 | IC1.31 60.09,90.73 56.52,87.15 | 56.52,87.15
  Bottom 0.406: X10.12 29.05,87 v29.05,87.31
N$51  (via drill 0.61)
  Top 0.254: v26.51,86.68 27.46,86.68 27.78,86.36 56.99,86.36 60.86,90.23 IC1.32
  Bottom 0.406: X10.13 26.51,86.36 v26.51,86.68
N$52  (via drill 0.61)
  Top 0.254: IC1.33 74.83,87.37 73.18,85.72 v23.97,85.72
  Bottom 0.406: X10.14 v23.97,85.72 | v23.97,85.72
N$53
  Top 0.406: R4.1
  Top 1.27: R4.1 X3.1
N$54  (via drill 0.61)
  Top 0.406: R67.2 54.45,19.05 53.18,20.32 53.18,22.86 54.13,23.81 | 54.13,23.81 54.45,23.81 | 54.13,23.81 54.29,23.81 54.45,23.97 54.45,24.13 51.35,27.23 T1.B2 49.65,29.33 51.28,30.96 51.28,36.04 v51.28,36.83 | 60.8,46.99 59.53,45.72 59.53,38.1 v58.26,36.83
  Bottom 0.406: v51.28,36.83 v58.26,36.83
N$55  (via drill 0.61)
  Top 0.254: v44.29,91.44 44.93,92.08 52.55,92.08 | 52.55,92.08 | IC1.23 55.2,94.73 52.55,92.08
  Bottom 0.406: X10.6 v44.29,91.44 | v44.29,91.44
N$56  (via drill 0.61)
  Top 0.406: R68.2 59.53,19.05 58.26,20.32 58.26,22.86 59.21,23.81 59.37,23.81 59.53,23.97 59.53,24.45 56.75,27.23 T2.B2 56,29.33 v56.04,29.37 | 62.07,45.72 62.07,37.62 61.28,36.83 60.48,36.83 59.21,35.56 v59.21,32.54 | v59.21,32.54 | v56.04,29.37
  Bottom 0.406: v56.04,29.37 v59.21,32.54
N$57
  Top 0.406: JP6.3 | JP6.3 R50.1
N$58  (via drill 0.61)
  Top 0.254: IC1.24 55.97,94.23 52.86,91.12 v49.37,91.12 | v49.37,91.12
  Bottom 0.406: v49.37,91.12 | X10.4 v49.37,91.12
N$59  (1 unrouted)
  Top 0.406: R70.2 69.69,19.05 68.42,20.32 68.42,22.86 69.37,23.81 | 69.37,23.81 | 69.69,23.81 69.69,25.56 68.7,26.55 T4.B2 68.7,27.66 65.25,31.11 65.25,35.56 67.15,37.47 67.15,45.72 68.42,46.99
N$60
  Bottom 0.406: X10.3 51.91,81.28 50.64,80.01 12.54,80.01 10,77.47 R89.2 | R89.2
N$61
  Top 0.406: JP6.1 | R59.2 JP6.1
N$62
  Top 0.406: R60.2 JP7.1
N$63
  Top 0.406: R61.2 JP8.1
N$64
  Top 0.406: R62.2 JP9.1
N$65  (via drill 0.61)  (1 unrouted)
  Top 0.254: 94.14,27.3 94.1,27.27 T8.B2
  Top 0.406: R74.2 90.01,19.05 88.74,20.32 88.74,22.86 89.69,23.81 | 89.69,23.81 | 78.58,46.99 77.31,45.72 v77.31,36.83 | v93.5,29.21 94.14,28.57 | 94.14,28.57 94.14,27.3 | v95.09,36.83 96.36,35.56 96.36,30.8 94.14,28.57
  Bottom 0.254: v90.01,29.21 91.28,29.21
  Bottom 0.406: 91.28,29.21 v93.5,29.21 | v95.09,36.83 v77.31,36.83
N$66
  Top 0.406: R63.2 JP10.1
N$67
  Top 0.406: R64.2 JP11.1
N$68
  Top 0.406: JP12.1 | R65.2 JP12.1
N$69
  Top 0.406: R66.2 JP13.1
N$70
  Top 0.406: 25.08,68.1 25.07,68.12 IC06.3
  Top 0.61: 25.08,68.1 25.08,66.52 26.51,65.09 C11.2 24.61,64.29 24.45,64.14 D3.K
N$71
  Top 0.61: X4.2 16.03,62.07 19.05,59.05 D3.A
N$86  (via drill 0.61)
  Top 0.406: R83.1 v56.36,80.64 | v56.36,80.64
  Bottom 0.406: X10.15 62.07,82.07 60.64,80.64 v56.36,80.64
N$87
  Top 0.406: T9.3 | X10.16 T9.3
N$88
  Top 0.406: T9.2 | R84.1 T9.2 | T9.2
N$89
  Top 0.406: JP5.3 R26.1
N$96
  Top 0.406: R25.1 44.45,52.55 | R25.1 | JP4.3 R25.1 | R25.1
N$97
  Top 0.406: JP3.3 R24.1
N$98
  Top 0.406: 49.37,52.55 R23.1 JP2.3
N$99
  Top 0.406: 49.37,41.75 | R85.2 49.37,41.75 | 49.37,41.75 JP2.1
N$100
  Top 0.406: R86.2 JP3.1
N$101
  Top 0.406: 44.29,41.75 | R87.2 44.29,41.75 | 44.29,41.75 JP4.1
N$102
  Top 0.406: R88.2 | R88.2 JP5.1 | R88.2 41.59,41.43
PF0
  Top 0.406: X6.1 56.99,12.7 54.45,15.24 54.45,16.51 54.29,16.67 R67.1
PF1
  Top 0.406: X6.2 62.07,12.7 59.53,15.24 R68.1 | R68.1 | R68.1
PF2
  Top 0.406: X6.3 67.15,12.7 64.61,15.24 R69.1 | R69.1
PF3
  Top 0.406: X6.4 72.23,12.7 69.69,15.24 R70.1 | R70.1 | R70.1
PF4
  Top 0.406: X7.1 77.31,12.7 74.77,15.24 R71.1
PF5
  Top 0.406: X7.2 82.39,12.7 79.85,15.24 R72.1 | R72.1
PF6
  Top 0.406: X7.3 87.47,12.7 84.93,15.24 R73.1 84.93,16.99
PF7
  Top 0.406: X7.4 92.55,12.7 90.01,15.24 R74.1 | R74.1
RESET
  Top 0.254: 80.49,114.3 C3.2 | 80.49,114.3 R13.1 79.53,132.24 87,139.7 91.28,139.7 JP1.4 | JP1.4 | IC1.3 81.33,112.19 80.49,113.03 80.49,114.3
RX2  (via drill 0.61)
  Top 0.254: IC1.64 85.35,97.73 85.88,98.27 85.88,100.65 84.93,101.6 84.93,128.91 v83.66,130.18 | v83.66,130.18
  Top 0.406: v63.66,130.18
  Bottom 0.406: v83.66,130.18 v63.66,130.18
SCL  (via drill 0.61)
  Top 0.254: IC1.60 85.89,95.73 87.95,97.79 87.95,103.82 87.63,104.14 v87.63,105.41
  Top 0.406: IC04.6 70.33,107.31 v70.96,106.68
  Bottom 0.406: v70.96,106.68 77.31,106.68 78.58,105.41 v87.63,105.41
SDA  (via drill 0.61)
  Top 0.254: IC1.61 85.59,96.23 87.31,97.95 87.31,103.35 v86.68,103.98
  Top 0.406: R47.1 64.29,105.09 65.25,106.05 IC04.5 v69.06,106.05
  Bottom 0.406: v86.68,103.98 71.12,103.98 v69.06,106.05
TX2  (via drill 0.61)
  Top 0.254: IC1.63 85.64,97.23 86.52,98.11 86.52,100.97 85.72,101.76 85.72,108.74 86.52,109.54 v86.52,128.91 | v63.66,128.91 63.5,128.91 | 63.5,128.91
  Bottom 0.406: v86.52,128.91 v63.66,128.91

## Text on the board
Top: 8..12V= | DLN:18319
Bottom: DLN:18319
tPlace: SCI/USB: | SCI/RS232: | 1 | TX1/PE0 | TX2/PC3 | RX1/PE1 | RX2/PC5 | BDM-Module | SCL=PC0 | SCDAT=PC1 | PA[0..7]=Data LCD | PG0=E PG1=RS | PG4=Backlight | 8..12V= | PB0 | PB1 | Pull: | Up | PD7 | PD0 | Down | PB2 | PB3 | PF0 | PF1 | PF2 | PF3 | PF4 | PF5 | PF6 | PF7 | DLN:18319 | +5V | GND | PB4 | PB5 | PB6 | PB7 | +5V | GND | PF0 | PF1 | PF2 | PF3 | PF4 | PF5 | PF7 | PF6